# Altium PCB POE_PCB.PcbDoc
Units mm, origin at the board's own origin, x right, y up, seen from the top; angles counter-clockwise.
Board outline 72.05 x 44.05 mm, 2 copper layers (Top Layer, Bottom Layer); 67 components, 44 nets, 189 pads, 534 vias.
Unrouted connection lines stored in the file: 1.
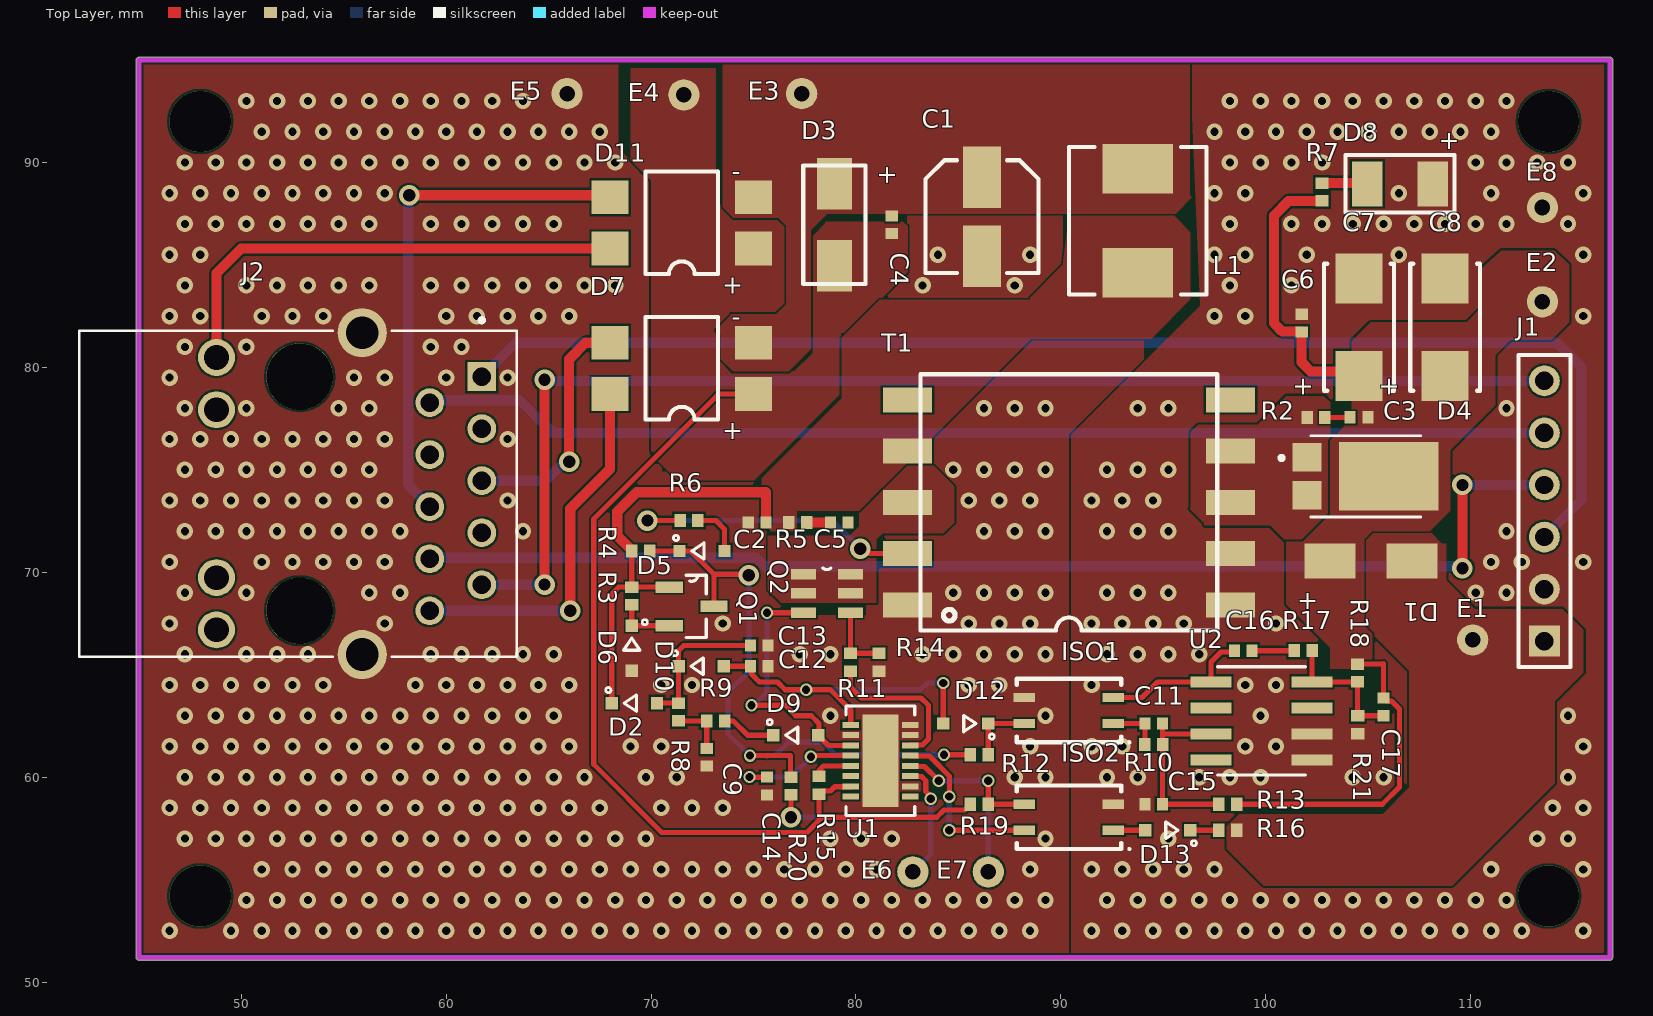
[diagram p0: Top Layer view]
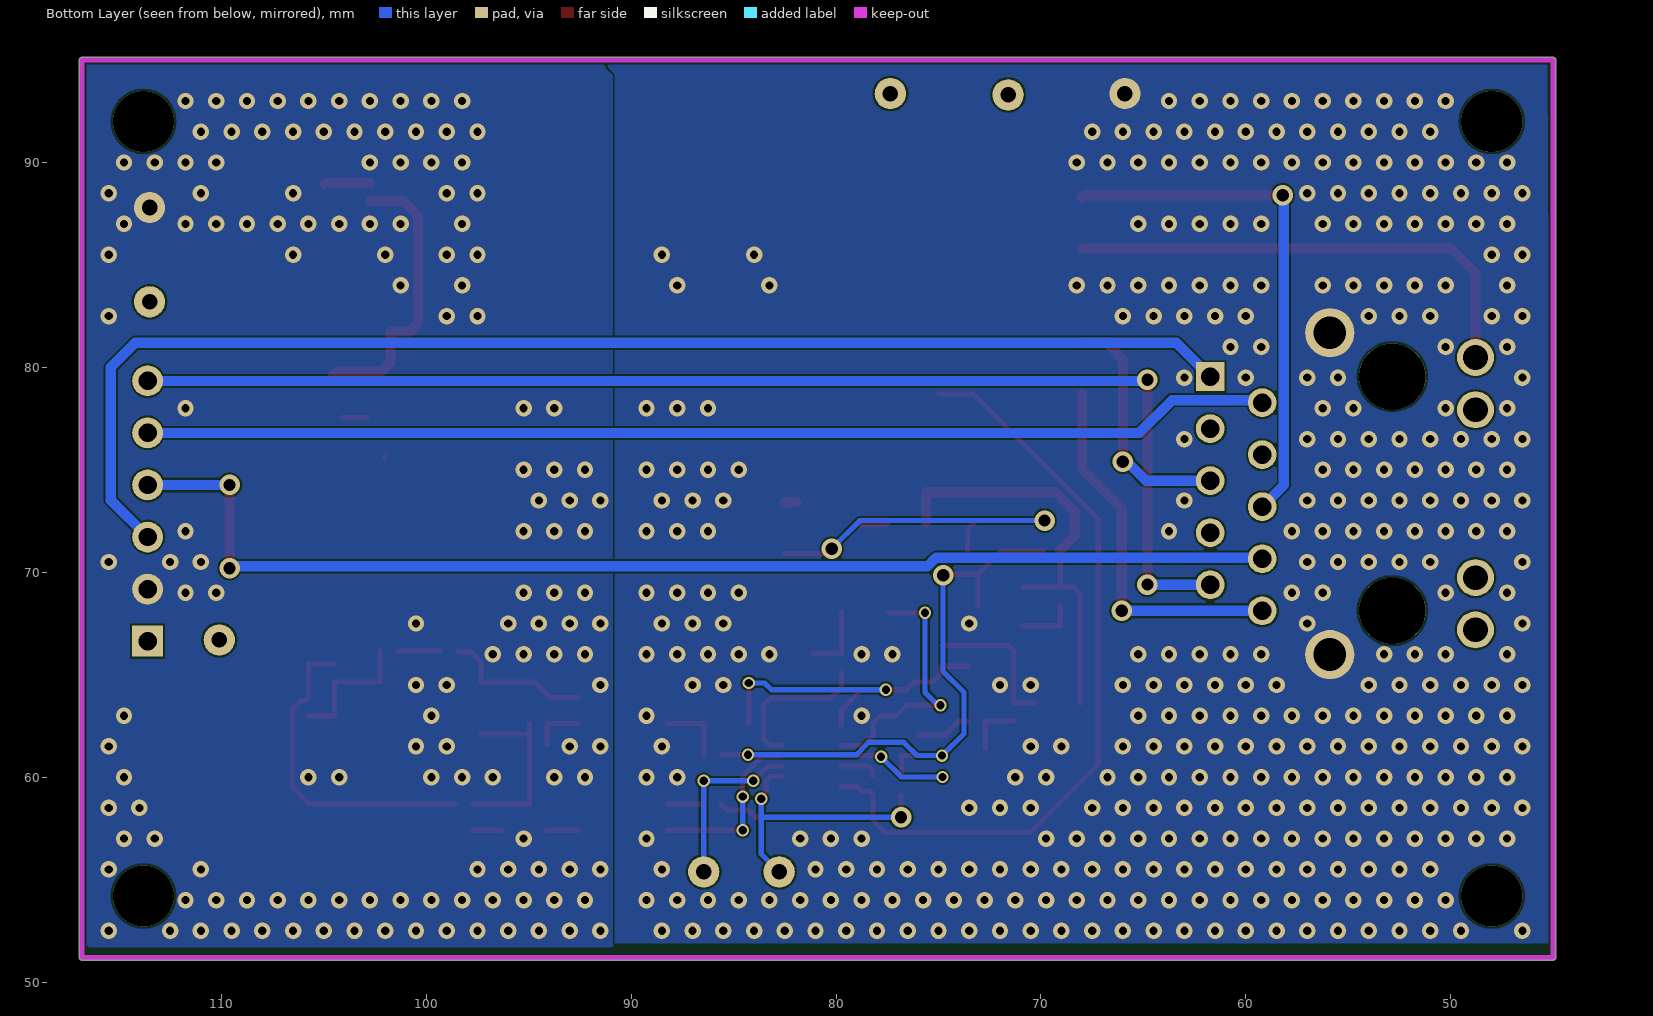
[diagram p1: Bottom Layer view, seen from below]
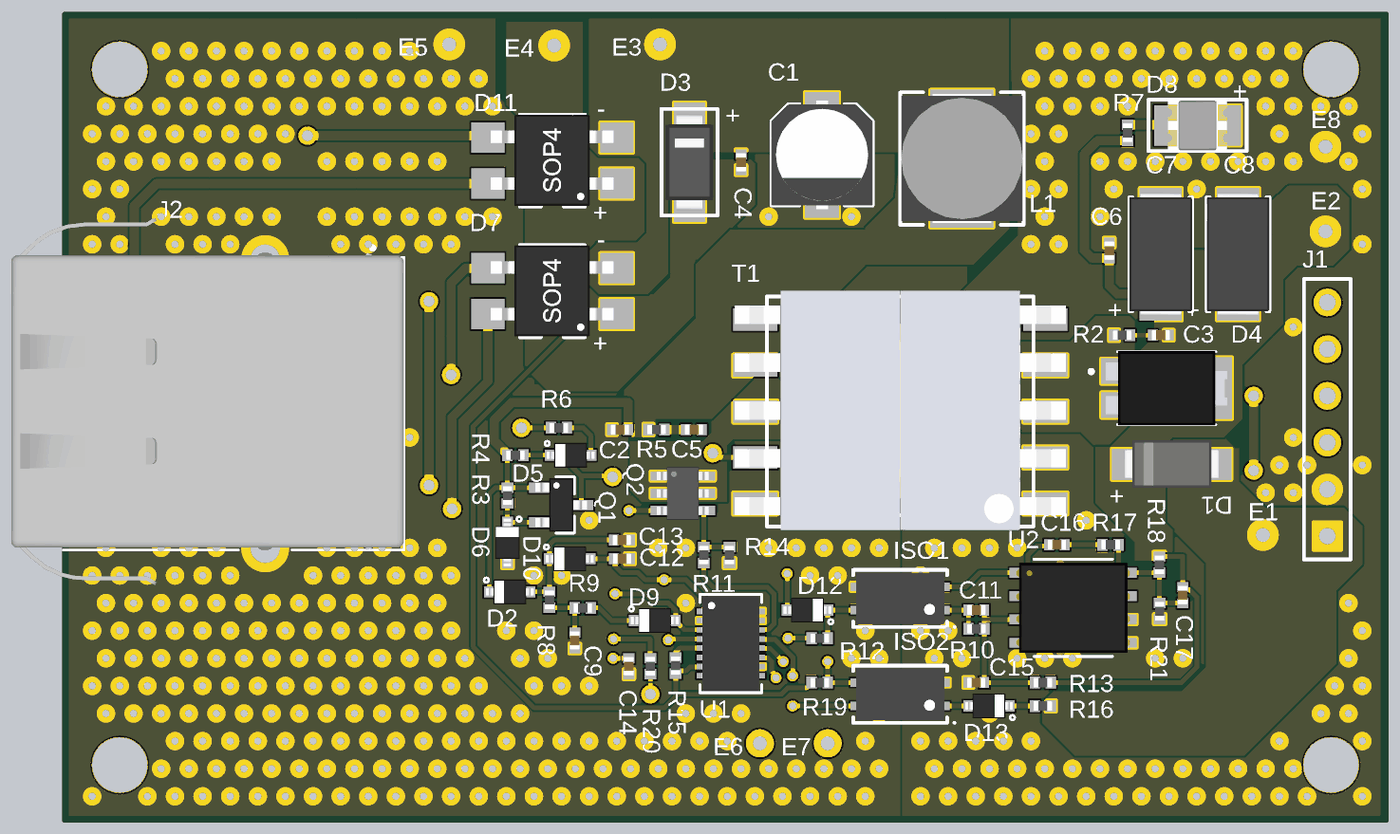
[diagram p2: 3D render of the assembled board from above, using the file's embedded part models]

## Layer stack, top to bottom
Top Solder: solder mask 0.0102, Solder Resist, Dk 3.5
Top Layer: signal copper 0.0356
Dielectric 1: dielectric 0.32, FR-4, Dk 4.8
Bottom Layer: signal copper 0.0356
Bottom Solder: solder mask 0.0102, Solder Resist, Dk 3.5

## Board outline
45,51.073 cw(c45,51.2) 44.873,51.2 44.873,95 cw(c45,95) 45,95.127 116.8,95.127 cw(c116.8,95) 116.927,95 116.927,51.2 cw(c116.8,51.2) 116.8,51.073

## Design rules (kind name [scope] priority, off if disabled: settings)
Clearance [All] p1: gap=0.1 ignorepadtopadclearanceinfootprint=TRUE
PlaneConnect [All] p1: planeconnectstyle=Direct reliefexpansion=0.508 reliefentries=4 reliefconductorwidth=0.254 reliefairgap=0.254
PolygonConnect [All] p1: connectstyle=Direct reliefconductorwidth=0.254 reliefentries=4 polygonreliefangle="90 Angle" airgapwidth=0.254
RoutingVias [All] p1: holewidth=0.6 width=1 viastyle="Through Hole" minholewidth=0.4 minwidth=0.6 maxholewidth=5 maxwidth=5
SolderMaskExpansion [All] p1: expansion=0.102
Width [All] p1: maxlimit=3 minlimit=0.254 preferedwidth=0.5 minimp=50.000000 maximp=50.000000 favimp=50.000000
29 further rules are at their usual default settings.

## Components (designator, comment, footprint, x,y, rotation, side; value= is the part's Value field where it differs from the comment)
C1 "EMVA630ADA4R7ME55G" CAPAE5953X52M 86.15,87.359 r270 top value=4.7uF
C2 "JMK105C6105KV-F" *CAPC1005X55N 75.176,72.427 r180 top value=1uF
C3 "CC0402KRX7R9BB681" *CAPC1005X55N 104.55,77.559 r0 top value=680pF
C4 "GRM155R71H104KE14J" *CAPC1005X55N 81.75,86.959 r270 top value=0.1uF
C5 "OPT" *CAPC1005X55N 79.189,72.427 r0 top
C6 "GRM155R60G106ME44D" *CAPC1005X55N 101.75,82.159 r270 top value=10uF
C7 "TPSC476K016R0350" CAPM6032X22N 104.55,81.959 r90 top value=47uF
C8 "TPSC476K016R0350" CAPM6032X22N 108.75,81.959 r90 top value=47uF
C9 "GRM155R61E103KA01D" *CAPC1005X55N 72.719,60.966 r90 top value=0.01uF
C11 "GRM155R61E103KA01D" *CAPC1005X55N 94.532,62.617 r0 top value=0.01uF
C12 "OPT" *CAPC1005X55N 75.282,65.411 r0 top
C13 "GRM155R61H474KE11D" *CAPC1005X55N 75.282,66.427 r180 top value=0.47uF
C14 "GRM155R60J475ME47D" *CAPC1005X55N 75.657,59.566 r90 top value=4.7uF
C15 "GRM155R61E103KA01D" *CAPC1005X55N 94.532,58.68 r180 top value=0.01uF
C16 "CC0402ZRY5V7BB333" *CAPC1005X55N 98.904,66.173 r0 top value=0.033uF
C17 "OPT" *CAPC1005X55N 105.745,63.43 r90 top
D1 "B220A-13-F" *SMA-DIODE 105.15,70.559 r180 top
D2 "1N4148WS-7-F" *SOD323_1N4148WS-7-F(Primary) 69.186,63.614 r0 top
D3 "SMAJ58A-13-F" SMAJ 78.95,86.959 r270 top
D4 "PDS360-13" *DIO_PDS360-13 104.873,74.682 r270 top
D5 "BAS516-TP" *SOD323_1N4148WS-7-F(Primary) 72.488,71.039 r0 top value=BAS516
D6 "MM3Z8V2ST1G" *SOD323_1N4148WS-7-F(Primary) 69.059,66.292 r270 top value=8.2V
D7 "HD01-T" HD01-T 75,78.7 r180 top
D8 "APD3224ZGC-F01" LED1210 106.55,88.959 r0 top value="LED GRN"
D9 "1N4148WS-7-F" *SOD323_1N4148WS-7-F(Primary) 77.06,62.05 r0 top
D10 "1N4148WS-7-F" *SOD323_1N4148WS-7-F(Primary) 72.445,65.411 r0 top
D11 "HD01-T" HD01-T 75,85.8 r180 top
D12 "BAS516-TP" *SOD323_1N4148WS-7-F(Primary) 85.358,62.617 r180 top value=BAS516
D13 "MM3Z8V2ST1G" *SOD323_1N4148WS-7-F(Primary) 95.221,57.41 r180 top value=8.2V
E1 "12V AUX" E_PAD 110.1,66.7 r0 top
E2 "VOUT(12V @ 0.9A)" E_PAD 113.5,83.2 r0 top
E3 "PoE+" E_PAD 77.35,93.359 r0 top
E4 "PoE-" E_PAD 71.6,93.3 r0 top
E5 "PGND" E_PAD 65.9,93.359 r0 top
E6 "PWRGD" E_PAD 82.775,55.378 r0 top
E7 "SIGDISA" E_PAD 86.458,55.378 r0 top
E8 "ISO GND" E_PAD 113.5,87.8 r0 top
ISO1 "PS2913-1-K-A" SOic254P1016X440-4N 90.395,63.252 r180 top value=8.2uH
ISO2 "PS2913-1-K-A" SOic254P1016X440-4N 90.395,58.045 r180 top value=8.2uH
J1 "Header 6" HDR1X6 113.6,66.64 r90 top
J2 "1-2301994-2" *TE_1-2301994-2_1-2301994-2(Primary) 52.775,73.835 r270 top
L1 "IHLP2525CZER8R2M01" INDP6866X23N 93.75,87.159 r270 top value=8.2uH
Q1 "MMBTA42LT1G" SOT-23-3(TO-236) 71.98,68.332 r0 top
Q2 "FDC2612" *SOT95P280X100-6N 78.584,68.967 r0 top
R2 "RC0402FR-0713RL" RESC1005X40N 102.452,77.559 r180 top value=13R
R3 "CRGCQ0402F220K" RESC1005X40N 69.059,68.84 r270 top value=220K
R4 "CRGCQ0402F220K" RESC1005X40N 69.494,71.039 r0 top value=220K
R5 "OPT" RESC1005X40N 77.154,72.427 r180 top
R6 "RC0402FR-07150RL" RESC1005X40N 71.853,72.523 r180 top value=150R
R7 "RC0402FR-072KL" RESC1005X40N 102.75,88.559 r90 top value=2K
R8 "RN73R1ETTP3003B25" RESC1005X40N 71.345,63.179 r270 top value=300K
R9 "RC0402FR-07100RL" RESC1005X40N 73.153,62.732 r0 top value=100R
R10 "ERA-2AEB752X" RESC1005X40N 94.535,61.601 r0 top value=7.5K
R11 "RC0402FR-0710KL" RESC1005X40N 79.727,65.611 r90 top value=10K
R12 "ERA-2AED682X" RESC1005X40N 86.023,61.093 r0 top value=6.8K
R13 "RC0402FR-071KL" RESC1005X40N 98.142,58.68 r0 top value=1K
R14 "ERJ-2BWFR050X" RESC1005X40N 81.124,65.611 r270 top value=0.05R
R15 "RP73PF1E45R3BTD" RESC1005X40N 78.197,59.604 r90 top value=45R3
R16 "ERA-2AEB4021X" RESC1005X40N 98.142,57.41 r0 top value=4.02K
R17 "RMCF0402FT61K9" RESC1005X40N 101.825,66.173 r180 top value=61.9K
R18 "RP73PF1E107KBTD" RESC1005X40N 104.475,65.084 r90 top value=107K
R19 "ERA-2AEB104X" RESC1005X40N 86.023,58.68 r0 top value=100K
R20 "CPF0402B200KE" RESC1005X40N 76.826,59.569 r270 top value=200K
R21 "ERA-2AEB2802X" RESC1005X40N 104.492,62.563 r90 top value=28K
T1 "PA1138NLT" EP13T 98.269,68.412 r180 top value=PA1138NL
U1 "LTC4267CDHC" DFN-16_DHC 81.196,60.8 r0 top
U2 "LT1431CS8PBF" *SO-8_S 99.793,62.744 r0 top

## Footprints (in the part's own frame and the unit in brackets; to place one, negate y for a bottom-side part, rotate by r counter-clockwise, add the part's x,y. Pads: shape width x height; smd on the part's side, far side on the other; paste and mask are expansions set on the pad)
*CAPC1005X55N [mm]
  rect 0.54x0.6 smd: 1(-0.432,0) 2(0.432,0)
  body extent -0.5,-0.27 0.5,0.28, height 0.48
*DIO_PDS360-13 [mm]
  rect 1.39x1.4 smd: 1(-0.92,-2.856) 2(0.92,-2.856)
  rect 3.36x4.86 smd: 3(0,1.126)
  silkscreen extent -1.98,-4.2 1.98,2.69, body extent -2.02,-3.3 2.03,3.3, height 1.17
*SMA-DIODE [mm]
  rect 2.5x1.7 smd: 1(-1.992,0.015) 2(2.008,0.015)
  body extent -2.6,-1.3 2.6,1.3, height 2.4
*SO-8_S [mil]
  rect 78x21 smd: 1(-97,75) 2(-97,25) 3(-97,-25) 4(-97,-75) 5(97,-75) 6(97,-25) 7(97,25) 8(97,75)
  silkscreen extent -84,-104 84,104, body extent -121,-101 121,101, height 41
*SOD323_1N4148WS-7-F(Primary) [mm]
  rect 0.6x0.6 smd: A(1.1,0) C(-1.1,0)
  silkscreen extent -1.4,-0.4 0.1,0.76, body extent -1.3,-0.67 1.3,0.68, height 1.1
*SOT95P280X100-6N [mil]
  rect 48x20 smd: 1(-45,37) 2(-45,0) 3(-45,-37) 4(45,-37) 5(45,0) 6(45,37)
  silkscreen extent -8,46 8,49, body extent -56,-57 56,57, height 39
*TE_1-2301994-2_1-2301994-2(Primary) [mm]
  round 3.25 hole 3.25 unplated: None(-5.715,0.075) None(5.715,0.075)
  rect 1.408x1.408 hole 0.9: P1(-5.715,8.965)
  round 1.408 hole 0.9: P2(-4.445,6.425) P3(-3.175,8.965) P4(-1.905,6.425) P5(-0.635,8.965) P6(0.635,6.425) P7(1.905,8.965) P8(3.175,6.425) P9(4.445,8.965) P10(5.715,6.425)
  round 1.8 hole 1.2: P11(-6.645,-3.985) P12(-4.095,-3.985) P13(4.095,-3.985) P14(6.645,-3.985)
  round 2.4 hole 1.6: SH1(-7.855,3.125) SH2(7.855,3.125)
  silkscreen extent -8.56,-10.68 7.95,10.68, body extent -10.13,-10.68 9.87,10.67, height 15.79
CAPAE5953X52M [mm] "Aluminum Electrolytic Capacitor, Body 5.30x5.30x5.20mm, IPC Low Density"
  rect 3x1.85 smd: 1(-1.925,0) 2(1.925,0)
  silkscreen extent -2.75,-2.75 2.75,2.75, body extent -2.95,-2.75 2.95,2.75, height 5.2
CAPM6032X22N [mm] "Molded Capacitor, 2-Leads, Body 6.00x3.20mm, IPC Medium Density"
  rect 2.45x2.3 smd: 1(-2.375,0) 2(2.375,0)
  silkscreen extent -3.1,-1.7 3.1,1.7, body extent -3.32,-1.7 3.32,1.7, height 2.2
DFN-16_DHC [mm]
  rect 0.805x0.3 smd: 1(-1.452,1.75) 2(-1.452,1.25) 3(-1.452,0.75) 4(-1.452,0.25) 5(-1.452,-0.25) 6(-1.452,-0.75) 7(-1.452,-1.25) 8(-1.452,-1.75) 9(1.452,-1.75) 10(1.452,-1.25) 11(1.452,-0.75) 12(1.452,-0.25) 13(1.452,0.25) 14(1.452,0.75) 15(1.452,1.25) 16(1.452,1.75)
  rect 1.75x4.5 smd paste-3: 17(0,0)
  silkscreen extent -1.68,-2.67 1.68,2.67, body extent -1.56,-2.54 1.56,2.56, height 0.8
E_PAD [mil]
  round 60 hole 30: 1(0,0)
EP13T [mm]
  rect 2.4x1.22 smd: 1(15.748,0) 2(15.748,-2.5) 3(15.748,-5) 4(15.748,-7.5) 5(15.748,-10) 6(-0.012,-10) 7(-0.012,-7.5) 8(-0.012,-5) 9(-0.012,-2.5) 10(-0.012,0)
  silkscreen extent 0.63,-11.25 15.11,1.25, body extent -1.13,-11.56 16.88,1.44, height 11.51
HD01-T [mm] "Bridge Rectifier Single Phase Standard 100V Surface Mount 4-MiniDIP"
  rect 1.8x1.65 smd: 1(0,0) 2(0,-2.5) 3(7,-2.5) 4(7,0)
  silkscreen extent 1.73,-3.75 5.27,1.25, body extent 0.17,-3.74 6.86,1.2, height 2.9
HDR1X6 [mm] "Connector; Header; 6 Position"
  rect 1.5x1.5 hole 0.9: 1(0,0)
  round 1.5 hole 0.9: 2(2.54,0) 3(5.08,0) 4(7.62,0) 5(10.16,0) 6(12.7,0)
  silkscreen extent -1.27,-1.27 13.97,1.27
INDP6866X23N [mil] "Precision Wire Wound Inductor, 2-Leads, Body 6.81x6.59mm, IPC Medium Density"
  rect 95.2x135 smd: 1(-100,0) 2(100,0)
  silkscreen extent -142,-132 142,132, body extent -138,-130 138,130, height 94
LED1210 [mm]
  rect 1.5x2.2 smd: A(-1.6,0) K(1.6,0)
  silkscreen extent -2.67,-1.4 2.67,1.4, body extent -1.62,-1.35 1.62,1.35, height 1.1
RESC1005X40N [mm]
  rect 0.56x0.64 smd: 1(-0.435,0) 2(0.435,0)
  body extent -0.5,-0.25 0.5,0.25, height 0.4
SMAJ [mm]
  rect 2.5x1.7 smd: A(-2,0) K(2,0)
  silkscreen extent -2.9,-1.52 2.9,1.52, body extent -2.6,-1.3 2.6,1.3, height 2.69
SOic254P1016X440-4N [mm] "SON, 4-Leads, Body 2.50x4.60mm, Pitch 1.27mm, IPC Medium Density"
  rect 1.05x0.45 smd: 1(-2.17,0.635) 2(-2.17,-0.635) 3(2.17,-0.635) 4(2.17,0.635)
  silkscreen extent -3,-1.55 2.55,1.6, body extent -2.4,-1.4 2.4,1.4, height 2.1
SOT-23-3(TO-236) [mil]
  rect 52x22 smd: 1(-43,37) 2(-43,-37) 3(43,0)
  silkscreen extent -11,-60 28,60, body extent -55,-57 55,57, height 51

## Part data
C1: "4.7µF 63V Aluminum Electrolytic Capacitors Radial, Can - SMD 2000 Hrs @ 85°C", Availability=Unavailable, MF="United Chemi-Con", MP=EMVA630ADA4R7ME55G, SnapEDA_Link=https://www.snapeda.com/parts/EMVA630ADA4R7ME55G/United%20Chemi-Con/view-part/?ref=search&t=EMVA630ADA4R7ME55G
C2: "1µF ±10% 6.3V Ceramic Capacitor X6S 0402 (1005 Metric)", Availability=Unavailable, Digi-Key_Part_Number=587-3381-2-ND, Digi-Key_Purchase_URL=https://www.digikey.com.au/product-detail/en/taiyo-yuden/JMK105C6105KV-F/587-3381-2-ND/4157224, MF="Taiyo Yuden", MP=JMK105C6105KV-F, SnapEDA_Link=https://www.snapeda.com/parts/JMK105C6105KV-F/Taiyo%20Yuden/view-part/?ref=search&t=JMK105C6105KV-F
C3: "680pF ±10% 50V Ceramic Capacitor X7R 0402 (1005 Metric)", Digi-Key Part Number=311-1030-2-ND, Availability=Unavailable, MF=Yageo, MP=CC0402KRX7R9BB681, SnapEDA_Link=https://www.snapeda.com/parts/CC0402KRX7R9BB681/Yageo/view-part/?ref=search&t=CC0402KRX7R9BB681
C4: "SMD Capacitor X7R(EIA) with Capacitance: 0.10uF Tol. 10%. Rated Voltage: 50Vdc", Availability=Unavailable, MF="Murata Electronics", MP=GRM155R71H104KE14J, SnapEDA_Link=https://www.snapeda.com/parts/GRM155R71H104KE14J/Murata%20Electronics%20North%20America/view-part/1836262/?ref=snap
C5 C12 C17: library part OPT_C, Availability=Unavailable
C6: "10µF ±20% 4V Ceramic Capacitor X5R 0402 (1005 Metric)", Digi-Key Part Number=490-10693-2-ND, Availability=Unavailable, MF="Murata Electronics", MP=GRM155R60G106ME44D, SnapEDA_Link=https://www.snapeda.com/parts/GRM155R60G106ME44D/Murata/view-part/?ref=search&t=GRM155R60G106ME44D
C7 C8: "47µF Molded Tantalum Capacitors 16V 2312 (6032 Metric) 350mOhm", Digi-Key Part Number=478-1773-2-ND, Availability=Unavailable, MF="AVX Corporation", MP=TPSC476K016R0350, SnapEDA_Link=https://www.snapeda.com/parts/TPSC476K016R0350/AVX/view-part/?ref=search&t=TPSC476K016R0350#download-modal
C9 C11 C15: "0.01uF ±10% 25V Ceramic Capacitor X5R 0402 (1005 Metric)", Availability=Unavailable, MF="Murata Electronics", MP=GRM155R61E103KA01D, SnapEDA_Link=https://www.snapeda.com/parts/GRM155R61E103KA01D/Murata%20Electronics/view-part/?ref=search&t=GRM155R61E103KA01D
C13: "0.47µF ±10% 50V Ceramic Capacitor X5R 0402 (1005 Metric)", Availability=Unavailable, MF="Murata Electronics", MP=GRM155R61H474KE11D, SnapEDA_Link=https://www.snapeda.com/parts/GRM155R61H474KE11D/Murata%20Electronics/view-part/?ref=search&t=GRM155R61H474KE11D
C14: "4.7µF ±20% 6.3V Ceramic Capacitor X5R 0402 (1005 Metric)", Availability=Unavailable, MF="Murata Electronics", MP=GRM155R60J475ME47D, SnapEDA_Link=https://www.snapeda.com/parts/GRM155R60J475ME47D/Murata/view-part/?ref=search&t=GRM155R60J475ME47D
C16: "0.033µF -20%, +80% 16V Ceramic Capacitor Y5V (F) 0402 (1005 Metric)", Digi-Key Part Number=311-1044-2-ND, Availability=Unavailable, MF=Yageo, MP=CC0402ZRY5V7BB333, SnapEDA_Link=https://www.snapeda.com/parts/CC0402ZRY5V7BB333/Yageo/view-part/?ref=search&t=CC0402ZRY5V7BB333
D1: "Diode Schottky 20V 2A Surface Mount SMA", Digi-Key Part Number=B220A-FDITR-ND, MF="Diodes Incorporated", MP=B220A-13-F, SnapEDA_Link=https://www.snapeda.com/parts/B220A-13-F/Diodes%20Inc./view-part/232956/?ref=snap
D2 D9 D10: "Diode Standard 75V 150mA Surface Mount SOD-323", Digi-Key Part Number=1N4148WS-FDITR-ND, Digi-Key_Purchase_URL=https://www.digikey.com.au/product-detail/en/diodes-incorporated/1N4148WS-7-F/1N4148WS-FDITR-ND/815127, MF="Diodes Incorporated", MP=1N4148WS-7-F, SnapEDA_Link=https://www.snapeda.com/parts/1N4148WS-7-F/Multicomp/view-part/957937/?ref=snap
D3: "93.6V Clamp 4.3A Ipp Tvs Diode Surface Mount SMA", Package="DO-214 Littelfuse", Availability=Unavailable, MF="Littelfuse Inc.", MP=SMAJ58A-13-F, Price=None, SnapEDA_Link=https://www.snapeda.com/parts/SMAJ58A/Littelfuse%20Inc./view-part/53813/?ref=snap
D5 D12: "Diode Standard 75V 250mA (DC) Surface Mount SOD-523", Digi-Key Part Number=BAS516-TPMSTR-ND, Digi-Key_Purchase_URL=https://www.digikey.com.au/product-detail/en/micro-commercial-co/BAS516-TP/BAS516-TPMSTR-ND/7681805, MF="Micro Commercial Co", MP=BAS516-TP, SnapEDA_Link=https://www.snapeda.com/parts/BAS516/Nexperia%20USA/view-part/?ref=search&t=BAS516-TP
D6 D13: "Zener Diode 8.2V 300mW ±2% Surface Mount SOD-323", Digi-Key_Part_Number=MM3Z8V2ST1GOSTR-ND, Digi-Key_Purchase_URL=https://www.digikey.com.au/product-detail/en/on-semiconductor/MM3Z8V2ST1G/MM3Z8V2ST1GOSTR-ND/661874, MF="ON Semiconductor", MP=MM3Z8V2ST1G, SnapEDA_Link=https://www.snapeda.com/parts/MM3Z8V2ST1G/ON%20Semiconductor/view-part/?ref=search&t=MM3Z8V2ST1G
D7 D11: "Bridge Rectifier Single Phase Standard 100V Surface Mount 4-MiniDIP", Package=None, Availability=Unavailable, MF="Diodes Incorporated", MP=HD01-T, Price=None, SnapEDA_Link=https://www.snapeda.com/parts/HD01-T/Diodes%20Inc./view-part/?ref=search&t=HD01-T
D8: "Green 525nm LED Indication - Discrete 3.3V 1210 (3225 Metric)", Package=None, Digi-Key_Part_Number=754-1089-2-ND, Digi-Key_Purchase_URL=https://www.digikey.com.au/product-detail/en/kingbright/APD3224ZGC-F01/754-1089-2-ND/1747487, MF=Kingbright, MP=APD3224ZGC-F01, SnapEDA_Link=https://www.snapeda.com/parts/APD3224ZGC-F01/Kingbright/view-part/?ref=search&t=APD3224ZGC-F01
E1 E2 E3 E4 E5 E6 E7 E8: library part E_PAD
ISO1 ISO2: "Optoisolator Transistor Output 2500Vrms 1 Channel 4-Mini-Flat", Digi-Key_Part_Number=PS2913-1-K-A-ND, Digi-Key_Purchase_URL=https://www.digikey.com.au/product-detail/en/cel/PS2913-1-K-A/PS2913-1-K-A-ND/2614692, MF=CEL, MP=PS2913-1-K-A, SnapEDA_Link=https://www.snapeda.com/parts/PS2913-1-K-A/CEL/view-part/?ref=search&t=ps2913-1-k-a#download-modal
J1: "Header, 6-Pin", LatestRevisionDate=17-Jul-2002, LatestRevisionNote="Re-released for DXP Platform.", Publisher="Altium Limited"
L1: "8.2µH Shielded Molded Inductor 4A 68mOhm Max Nonstandard", Package=None, Availability=Unavailable, MF="Vishay Dale", MP=IHLP2525CZER8R2M01, Price=None, SnapEDA_Link=https://www.snapeda.com/parts/IHLP2525CZER8R2M01/Vishay%20Dale/view-part/?ref=search&t=IHLP2525CZER8R2M01
Q1: "Bipolar (BJT) Transistor NPN 300V 500mA 50MHz 225mW Surface Mount SOT-23-3 (TO-236)", Digi-Key_Part_Number=MMBTA42LT1GOSTR-ND, Digi-Key_Purchase_URL=https://www.digikey.com.au/product-detail/en/on-semiconductor/MMBTA42LT1G/MMBTA42LT1GOSTR-ND/919627, MF="ON Semiconductor", MP=MMBTA42LT1G, SnapEDA_Link=https://www.snapeda.com/parts/MMBTA42LT1G/ON%20Semiconductor/view-part/?ref=search&t=MMBTA42LT1G
Q2: "N-Channel 200V 1.1A (Ta) 1.6W (Ta) Surface Mount SuperSOT™-6", Digi-Key Part Number=FDC2612TR-ND, ComponentLink1Description="Manufacturer Link", ComponentLink1URL=http://www.irf.com/, Digi-Key_Purchase_URL=https://www.digikey.com.au/product-detail/en/on-semiconductor/FDC2612/FDC2612TR-ND/979778, MF="ON Semiconductor", MP=FDC2612, SnapEDA_Link=https://www.snapeda.com/parts/FDC2612/ON%20Semiconductor/view-part/?ref=search&t=FDC2612
R2: "13 Ohms ±1% 0.063W, 1/16W Chip Resistor 0402 (1005 Metric) Moisture Resistant Thick Film", Package=none, Digi-Key_Part_Number=YAG2977TR-ND, Digi-Key_Purchase_URL=https://www.digikey.com.au/product-detail/en/yageo/RC0402FR-0713RL/YAG2977TR-ND/5280837, MF=Yageo, MP=RC0402FR-0713RL, SnapEDA_Link=https://www.snapeda.com/parts/RC0402FR-0713RL/Yageo/view-part/?ref=search&t=RC0402FR-0713RL
R3 R4: "220 kOhms ±1% 0.063W, 1/16W Chip Resistor 0402 (1005 Metric) Automotive AEC-Q200, Moisture Resistant Thick Film", Package=None, Digi-Key_Part_Number=A129655TR-ND, Digi-Key_Purchase_URL=https://www.digikey.com.au/product-detail/en/te-connectivity-passive-product/CRGCQ0402F220K/A129655TR-ND/8576257, MF="TE Connectivity Passive Product", MP=CRGCQ0402F220K, SnapEDA_Link=https://www.snapeda.com/parts/CRGCQ0402F220K/TE%20Connectivity/view-part/?ref=search&t=CRGCQ0402F220K
R5: library part OPT_R, Package=none
R6: "150 Ohms ±1% 0.063W, 1/16W Chip Resistor 0402 (1005 Metric) Moisture Resistant Thick Film", Package=none, Digi-Key_Part_Number=311-150LRTR-ND, Digi-Key_Purchase_URL=https://www.digikey.com.au/product-detail/en/yageo/RC0402FR-07150RL/311-150LRTR-ND/726543, MF=Yageo, MP=RC0402FR-07150RL, SnapEDA_Link=https://www.snapeda.com/parts/RC0402FR-07150RL/Yageo/view-part/?ref=search&t=RC0402FR-07150RL
R7: "2 kOhms ±1% 0.063W, 1/16W Chip Resistor 0402 (1005 Metric) Moisture Resistant Thick Film", Package=None, Digi-Key_Part_Number=311-2KLRTR-ND, Digi-Key_Purchase_URL=https://www.digikey.com.au/product-detail/en/yageo/RC0402FR-072KL/311-2KLRTR-ND/2827565, MF=Yageo, MP=RC0402FR-072KL, SnapEDA_Link=https://www.snapeda.com/parts/RC0402FR-072KL/Yageo/view-part/?ref=search&t=RC0402FR-072KL
R8: "300 kOhms ±0.1% 0.063W, 1/16W Chip Resistor 0402 (1005 Metric) Moisture Resistant Metal Film", Package=None, Digi-Key_Part_Number=2019-RN73R1ETTP3003B25TR-ND, Digi-Key_Purchase_URL=https://www.digikey.com.au/product-detail/en/koa-speer-electronics-inc/RN73R1ETTP3003B25/2019-RN73R1ETTP3003B25TR-ND/10003541, MF="KOA Speer Electronics, Inc.", MP=RN73R1ETTP3003B25, SnapEDA_Link=https://www.snapeda.com/parts/RN73R1ETTP3003B25/KOA%20Speer%20Electronics,%20Inc./view-part/?ref=search&t=RN73R1ETTP3003B25
R9: "100 Ohms ±1% 0.063W, 1/16W Chip Resistor 0402 (1005 Metric) Moisture Resistant Thick Film", Package=None, Digi-Key_Part_Number=311-100LRTR-ND, Digi-Key_Purchase_URL=https://www.digikey.com.au/product-detail/en/yageo/RC0402FR-07100RL/311-100LRTR-ND/726527, MF=Yageo, MP=RC0402FR-07100RL, SnapEDA_Link=https://www.snapeda.com/parts/RC0402FR-07100RL/Yageo/view-part/?ref=search&t=RC0402FR-07100RL
R10: "7.5 kOhms ±0.1% 0.063W, 1/16W Chip Resistor 0402 (1005 Metric) Automotive AEC-Q200 Thin Film", Package=None, Digi-Key_Part_Number=P7.5KDCTR-ND, Digi-Key_Purchase_URL=https://www.digikey.com.au/product-detail/en/panasonic-electronic-components/ERA-2AEB752X/P7-5KDCTR-ND/1706026, MF="Panasonic Electronic Components", MP=ERA-2AEB752X, SnapEDA_Link=https://www.snapeda.com/parts/ERA-2AEB752X/Panasonic/view-part/?ref=search&t=ERA-2AEB752X
R11: "10 kOhms ±1% 0.063W, 1/16W Chip Resistor 0402 (1005 Metric) Moisture Resistant Thick Film", Package=None, Digi-Key_Part_Number=311-10.0KLRTR-ND, Digi-Key_Purchase_URL=https://www.digikey.com.au/product-detail/en/yageo/RC0402FR-0710KL/311-10-0KLRTR-ND/726523, MF=Yageo, MP=RC0402FR-0710KL, SnapEDA_Link=https://www.snapeda.com/parts/RC0402FR-0710KL/Yageo/view-part/?ref=search&t=RC0402FR-0710KL
R12: "6.8 kOhms ±0.5% 0.063W, 1/16W Chip Resistor 0402 (1005 Metric) Automotive AEC-Q200 Thin Film", Package=none, Digi-Key_Part_Number=P6.8KDETR-ND, Digi-Key_Purchase_URL=https://www.digikey.com.au/product-detail/en/panasonic-electronic-components/ERA-2AED682X/P6-8KDETR-ND/1706122, MF="Panasonic Electronic Components", MP=ERA-2AED682X, SnapEDA_Link=https://www.snapeda.com/parts/ERA-2AED682X/Panasonic/view-part/?ref=search&t=ERA-2AED682X
R13: "1 kOhms ±1% 0.063W, 1/16W Chip Resistor 0402 (1005 Metric) Moisture Resistant Thick Film", Package=None, Digi-Key_Part_Number=311-1.00KLRTR-ND, Digi-Key_Purchase_URL=https://www.digikey.com.au/product-detail/en/yageo/RC0402FR-071KL/311-1-00KLRTR-ND/726513, MF=Yageo, MP=RC0402FR-071KL, SnapEDA_Link=https://www.snapeda.com/parts/RC0402FR-071KL/Yageo/view-part/?ref=search&t=RC0402FR-071KL
R14: "50 mOhms ±1% 0.25W, 1/4W Chip Resistor 0402 (1005 Metric) Automotive AEC-Q200, Current Sense Thick Film", Package=None, Digi-Key_Part_Number=P17367TR-ND, Digi-Key_Purchase_URL=https://www.digikey.com.au/product-detail/en/panasonic-electronic-components/ERJ-2BWFR050X/P17367TR-ND/5647400, MF="Panasonic Electronic Components", MP=ERJ-2BWFR050X, SnapEDA_Link=https://www.snapeda.com/parts/ERJ-2BWFR050X/Panasonic%20Electronic/view-part/?ref=search&t=ERJ-2BWFR050X
R15: "Fixed Resistor RP 1E 0.1W 45R3 0.1% 25PPM 5K RL", Package=None, Digi-Key_Part_Number=A127190TR-ND, Digi-Key_Purchase_URL=https://www.digikey.com.au/product-detail/en/te-connectivity-passive-product/RP73PF1E45R3BTD/A127190TR-ND/8260732, MF="TE Connectivity Passive Product", MP=RP73PF1E45R3BTD, SnapEDA_Link=https://www.snapeda.com/parts/RP73PF1E45R3BTD/TE%20Connectivity/view-part/?ref=search&t=RP73PF1E45R3BTD
R16: "4.02 kOhms ±0.1% 0.063W, 1/16W Chip Resistor 0402 (1005 Metric) Automotive AEC-Q200 Thin Film", Package=None, Digi-Key_Part_Number=P4.02KDCTR-ND, Digi-Key_Purchase_URL=https://www.digikey.com.au/product-detail/en/panasonic-electronic-components/ERA-2AEB4021X/P4-02KDCTR-ND/2026107, MF="Panasonic Electronic Components", MP=ERA-2AEB4021X, SnapEDA_Link=https://www.snapeda.com/parts/ERA-2AEB4021X/Panasonic%20Electronic/view-part/?ref=search&t=ERA-2AEB4021X
R17: "61.9 kOhms ±1% 0.063W, 1/16W Chip Resistor 0402 (1005 Metric) Automotive AEC-Q200 Thick Film", Package=None, Digi-Key_Part_Number=RMCF0402FT61K9TR-ND, Digi-Key_Purchase_URL=https://www.digikey.com.au/product-detail/en/stackpole-electronics-inc/RMCF0402FT61K9/RMCF0402FT61K9TR-ND/1761731, MF="Stackpole Electronics Inc", MP=RMCF0402FT61K9, SnapEDA_Link=https://www.snapeda.com/parts/RMCF0402FT61K9/Stackpole%20Electronics%20Inc/view-part/?ref=search&t=RMCF0402FT61K9
R18: "107 kOhms ±0.1% 0.1W, 1/10W Chip Resistor 0402 (1005 Metric) Thin Film", Package=None, Digi-Key_Part_Number=A127514TR-ND, Digi-Key_Purchase_URL=https://www.digikey.com.au/product-detail/en/te-connectivity-passive-product/RP73PF1E107KBTD/A127514TR-ND/8261056, MF="TE Connectivity Passive Product", MP=RP73PF1E107KBTD, SnapEDA_Link=https://www.snapeda.com/parts/RP73PF1E107KBTD/TE%20Connectivity/view-part/?ref=search&t=RP73PF1E107KBTD
R19: "100 kOhms ±0.1% 0.063W, 1/16W Chip Resistor 0402 _1005 Metric_ Automotive AEC-Q200 Thin Film", Package="1005 Panasonic Electronic Components", Digi-Key_Part_Number=P100KDCCT-ND, Digi-Key_Purchase_URL=https://www.digikey.com/product-detail/en/panasonic-electronic-components/ERA-2AEB104X/P100KDCCT-ND/1706231?utm_source=snapeda&utm_medium=aggregator&utm_campaign=symbol, MF="Panasonic Electronic", MP=ERA-2AEB104X, SnapEDA_Link=https://www.snapeda.com/parts/ERA-2AEB104X/Panasonic%20Electronic%20Components/view-part/419877/?ref=snap
R20: "200 kOhms ±0.1% 0.063W, 1/16W Chip Resistor 0402 (1005 Metric) Thin Film", Package=none, Digi-Key_Part_Number=A119933TR-ND, Digi-Key_Purchase_URL=https://www.digikey.com.au/product-detail/en/te-connectivity-passive-product/CPF0402B200KE/A119933TR-ND/4966463, MF="TE Connectivity Passive Product", MP=CPF0402B200KE, SnapEDA_Link=https://www.snapeda.com/parts/CPF0402B200KE/TE%20Connectivity/view-part/?ref=search&t=CPF0402B200KE
R21: "28 kOhms ±0.1% 0.063W, 1/16W Chip Resistor 0402 (1005 Metric) Automotive AEC-Q200 Thin Film", Package=None, Digi-Key_Part_Number=P28KDCTR-ND, Digi-Key_Purchase_URL=https://www.digikey.com.au/product-detail/en/panasonic-electronic-components/ERA-2AEB2802X/P28KDCTR-ND/2026182, MF="Panasonic Electronic Components", MP=ERA-2AEB2802X, SnapEDA_Link=https://www.snapeda.com/parts/ERA-2AEB2802X/Panasonic/view-part/?ref=search&t=ERA-2AEB2802X
T1: "127µH Isolation and Data Interface (Encapsulated) Pulse Transformer 1:0.292:0.208 Surface Mount", Package=None, Digi-Key_Part_Number=553-1984-1-ND, Digi-Key_Purchase_URL=https://www.digikey.com.au/product-detail/en/pulse-electronics-power/PA1138NLT/553-1984-1-ND/3179343, MF="Pulse Electronics Power", MP=PA1138NLT, SnapEDA_Link=https://www.snapeda.com/parts/PA1138NLT/Pulse%20Electronics/view-part/?ref=search&t=PA1138NLT
U1: "Power Switch ICs - POE / LAN LTC4267 - Power over Ethernet IEEE 802.3af PD Interface with Integrated Switching Regulator", Package=None, Availability=Unavailable, MF="Analog Devices / Linear Technology", MP=LTC4267CDHC, Price=None, SnapEDA_Link=https://www.snapeda.com/parts/LTC4267CDHC/Analog%20Devices/view-part/4219202/?ref=snap
U2: "Shunt Voltage Reference IC 36V ±0.4% 8-SOIC", Digi-Key Part Number=LT1431CS8#PBF-ND, MF="Linear Technology/Analog Devices", MP=LT1431CS8#PBF, SnapEDA_Link=https://www.snapeda.com/parts/LT1431CS8%23PBF/Analog%20Devices/view-part/4342248/?ref=snap
D4: SnapEDA_Link=https://www.snapeda.com/parts/PDS360-13/Diodes%20Inc./view-part/110877/?ref=snap
J2: SnapEDA_Link=https://www.snapeda.com/parts/1-2301994-2/TE%20Connectivity%20AMP%20Connectors/view-part/1504817/?ref=snap

## Via types
v1: diameter 0.8, hole 0.4, Top Layer to Bottom Layer, 506 vias
v2: diameter 0.6, hole 0.4, Top Layer to Bottom Layer, 13 vias
v3: diameter 1, hole 0.6, Top Layer to Bottom Layer, 11 vias
v4: diameter 3, hole 3, Top Layer to Bottom Layer, 4 vias

## Nets (pads, with @x,y where several pads share a name; then routed paths per layer and width w, separated by ;. In a path a pad name is that pad's centre, name@x,y a point inside that pad or via, vN(x,y) a via of type N, cw(c..) or ccw(c..) an arc to the next point about the centre after c; other vN are vias at no path point)
GND: C1.2 C2.2 C9.1 C12.2 C13.1 C14.1 D6.A E5.1 ISO1.3 J2.SH1 J2.SH2 R14.2 T1.1 U1.2 U1.10 U1.15 U1.16 U1.17
  other v1: 46.5,52.5 49.5,52.5 51,52.5 52.5,52.5 54,52.5 55.5,52.5 57,52.5 58.5,52.5 60,52.5 61.5,52.5 63,52.5 64.5,52.5 66,52.5 67.5,52.5 69,52.5 70.5,52.5 72,52.5 73.5,52.5 75,52.5 76.5,52.5 78,52.5 79.5,52.5 81,52.5 82.5,52.5 84,52.5 85.5,52.5 87,52.5 88.5,52.5 50.25,54 51.75,54 53.25,54 54.75,54 56.25,54 57.75,54 59.25,54 60.75,54 62.25,54 63.75,54 65.25,54 66.75,54 68.25,54 69.75,54 71.25,54 72.75,54 74.25,54 75.75,54 77.25,54 78.75,54 80.25,54 81.75,54 83.25,54 84.75,54 86.25,54 87.75,54 89.25,54 51,55.5 52.5,55.5 54,55.5 55.5,55.5 57,55.5 58.5,55.5 60,55.5 61.5,55.5 63,55.5 64.5,55.5 66,55.5 67.5,55.5 69,55.5 70.5,55.5 72,55.5 73.5,55.5 75,55.5 76.5,55.5 78,55.5 79.5,55.5 81,55.5 88.5,55.5 47.25,57 48.75,57 50.25,57 51.75,57 53.25,57 54.75,57 56.25,57 57.75,57 59.25,57 60.75,57 62.25,57 63.75,57 65.25,57 66.75,57 68.25,57 69.75,57 78.75,57 80.25,57 81.75,57 89.25,57 46.5,58.5 48,58.5 49.5,58.5 51,58.5 52.5,58.5 54,58.5 55.5,58.5 57,58.5 58.5,58.5 60,58.5 61.5,58.5 63,58.5 64.5,58.5 66,58.5 67.5,58.5 70.5,58.5 72,58.5 73.5,58.5 47.25,60 48.75,60 50.25,60 51.75,60 53.25,60 54.75,60 56.25,60 57.75,60 59.25,60 60.75,60 62.25,60 63.75,60 65.25,60 66.75,60 69.75,60 71.25,60 87.75,60 89.25,60 46.5,61.5 48,61.5 49.5,61.5 51,61.5 52.5,61.5 54,61.5 55.5,61.5 57,61.5 58.5,61.5 60,61.5 61.5,61.5 63,61.5 64.5,61.5 66,61.5 69,61.5 70.5,61.5 88.5,61.5 47.25,63 48.75,63 50.25,63 51.75,63 53.25,63 54.75,63 56.25,63 57.75,63 59.25,63 60.75,63 62.25,63 63.75,63 65.25,63 78.75,63 89.25,63 46.5,64.5 48,64.5 49.5,64.5 51,64.5 52.5,64.5 54,64.5 58.5,64.5 60,64.5 61.5,64.5 63,64.5 64.5,64.5 66,64.5 70.5,64.5 72,64.5 85.5,64.5 87,64.5 47.25,66 50.25,66 51.75,66 53.25,66 59.25,66 60.75,66 62.25,66 63.75,66 65.25,66 77.25,66 78.75,66 83.25,66 84.75,66 86.25,66 87.75,66 89.25,66 46.5,67.5 57,67.5 73.5,67.5 85.5,67.5 87,67.5 88.5,67.5 47.25,69 50.25,69 56.25,69 57.75,69 84.75,69 86.25,69 87.75,69 89.25,69 46.5,70.5 51,70.5 52.5,70.5 54,70.5 55.5,70.5 57,70.5 47.25,72 48.75,72 50.25,72 51.75,72 53.25,72 54.75,72 56.25,72 57.75,72 63.75,72 86.25,72 87.75,72 89.25,72 46.5,73.5 48,73.5 49.5,73.5 51,73.5 52.5,73.5 54,73.5 55.5,73.5 57,73.5 63,73.5 85.5,73.5 87,73.5 88.5,73.5 47.25,75 48.75,75 50.25,75 51.75,75 53.25,75 54.75,75 56.25,75 84.75,75 86.25,75 87.75,75 89.25,75 46.5,76.5 48,76.5 49.5,76.5 51,76.5 52.5,76.5 54,76.5 55.5,76.5 57,76.5 63,76.5 47.25,78 50.25,78 54.75,78 56.25,78 86.25,78 87.75,78 89.25,78 46.5,79.5 55.5,79.5 57,79.5 60,79.5 63,79.5 47.25,81 50.25,81 59.25,81 60.75,81 46.5,82.5 48,82.5 51,82.5 52.5,82.5 54,82.5 60,82.5 61.5,82.5 63,82.5 64.5,82.5 66,82.5 47.25,84 50.25,84 51.75,84 53.25,84 54.75,84 56.25,84 59.25,84 60.75,84 62.25,84 63.75,84 65.25,84 66.75,84 68.25,84 83.25,84 87.75,84 46.5,85.5 48,85.5 84,85.5 88.5,85.5 47.25,87 48.75,87 50.25,87 51.75,87 53.25,87 54.75,87 56.25,87 59.25,87 60.75,87 62.25,87 63.75,87 65.25,87 46.5,88.5 48,88.5 49.5,88.5 51,88.5 52.5,88.5 54,88.5 55.5,88.5 57,88.5 47.25,90 48.75,90 50.25,90 51.75,90 53.25,90 54.75,90 56.25,90 57.75,90 59.25,90 60.75,90 62.25,90 63.75,90 65.25,90 66.75,90 68.25,90 51,91.5 52.5,91.5 54,91.5 55.5,91.5 57,91.5 58.5,91.5 60,91.5 61.5,91.5 63,91.5 64.5,91.5 66,91.5 67.5,91.5 50.25,93 51.75,93 53.25,93 54.75,93 56.25,93 57.75,93 59.25,93 60.75,93 62.25,93 63.75,93
GROUND: C6.1 C7.2 C8.2 C15.2 D8.K E8.1 ISO2.2 J1.2 R21.1 T1.9 T1.10 U2.5 U2.6
  other v1: 91.5,52.5 93,52.5 94.5,52.5 96,52.5 97.5,52.5 99,52.5 100.5,52.5 102,52.5 103.5,52.5 105,52.5 106.5,52.5 108,52.5 109.5,52.5 111,52.5 112.5,52.5 115.5,52.5 92.25,54 93.75,54 95.25,54 96.75,54 98.25,54 99.75,54 101.25,54 102.75,54 104.25,54 105.75,54 107.25,54 108.75,54 110.25,54 111.75,54 91.5,55.5 93,55.5 94.5,55.5 96,55.5 97.5,55.5 111,55.5 115.5,55.5 95.25,57 113.25,57 114.75,57 114,58.5 115.5,58.5 92.25,60 93.75,60 96.75,60 98.25,60 99.75,60 104.25,60 105.75,60 114.75,60 91.5,61.5 93,61.5 99,61.5 100.5,61.5 115.5,61.5 99.75,63 114.75,63 91.5,64.5 99,64.5 100.5,64.5 92.25,66 93.75,66 95.25,66 96.75,66 91.5,67.5 93,67.5 94.5,67.5 96,67.5 100.5,67.5 92.25,69 93.75,69 95.25,69 110.25,69 111.75,69 111,70.5 112.5,70.5 115.5,70.5 92.25,72 93.75,72 95.25,72 111.75,72 91.5,73.5 93,73.5 94.5,73.5 92.25,75 93.75,75 95.25,75 93.75,78 95.25,78 111.75,78 97.5,82.5 99,82.5 115.5,82.5 98.25,84 101.25,84 97.5,85.5 99,85.5 102,85.5 106.5,85.5 115.5,85.5 98.25,87 101.25,87 102.75,87 104.25,87 105.75,87 107.25,87 108.75,87 110.25,87 111.75,87 114.75,87 97.5,88.5 99,88.5 106.5,88.5 111,88.5 115.5,88.5 98.25,90 99.75,90 101.25,90 102.75,90 110.25,90 111.75,90 113.25,90 114.75,90 97.5,91.5 99,91.5 100.5,91.5 102,91.5 103.5,91.5 105,91.5 106.5,91.5 108,91.5 109.5,91.5 111,91.5 98.25,93 99.75,93 101.25,93 102.75,93 104.25,93 105.75,93 107.25,93 108.75,93 110.25,93 111.75,93
NetC1_1: C1.1 C4.1 D3.A D7.2 D11.2 E3.1 L1.1
NetC2_1: C2.1 D2.C L1.2 Q1.1 R3.1 R4.1 R5.2 T1.4 | length 21.4
  Top Layer w0.254: D2.C 68.086,68.937 68.424,69.275 R3.1 ; R4.1 R3.1 ; Q1.1 70.886,69.273 69.061,69.273 R3.1
  Top Layer w0.5: R4.1 69.059,71.079 68.35,71.788 68.35,72.955 69.299,73.904 75.608,73.904 C2.1
NetC3_1: C3.1 R2.1 | length 1.2
  Top Layer w0.254: R2.1 C3.1
NetC3_2: C3.2 C6.2 C7.1 C8.1 C17.2 D1.2 D4.3 E2.1 R7.1 R13.2 R18.2 | length 30
  Top Layer w0.254: R13.2 105.688,58.68 106.523,59.515 106.523,63.329 106.133,63.719 105.888,63.719 C17.2 105.745,65.538 105.735,65.529 104.484,65.529 R18.2
  Top Layer w0.5: R7.1 101.124,88.124 100.4,87.4 100.4,82.16 100.813,81.747 101.73,81.747 C6.2 101.75,80.25 102.2,79.8 104.334,79.8 C7.1
NetC4_2: C4.2 D3.K D7.1 D11.1 E4.1 R15.1 R19.1 U1.7 | length 45.6
  Top Layer w0.254: D7.1 73.3,78.7 67.2,72.6 67.2,60.627 70.522,57.305 77.605,57.305 78.197,57.897 ; U1.7 79.72,59.527 78.96,59.527 78.755,59.322 78.35,59.322 R15.1 78.197,57.897 ; R19.1 85.588,58.64 85.435,58.487 85.395,58.487 85.308,58.4 84.3,58.4 83.945,58.045 78.345,58.045 78.197,57.897
NetC5_1: C5.1 R5.1 | length 1.2
  Top Layer w0.5: R5.1 C5.1
NetC5_2: C5.2 Q2.1 Q2.2 Q2.5 Q2.6 T1.3 | length 0.6
  Top Layer w0.5: T1.3@81.931,73.412 T1.3
NetC9_2: C9.2 R8.2 R9.1 | length 2.7
  Top Layer w0.254: R8.2 71.351,62.738 72.712,62.738 R9.1 ; C9.2@72.719,61.399 R9.1@72.719,62.731
NetC11_1: C11.1 ISO1.1 R10.1 | length 2.6
  Top Layer w0.254: ISO1.1 C11.1 R10.1
NetC11_2: C11.2 C15.1 R10.2 R13.1 U2.3 | length 9
  Top Layer w0.254: C11.2 94.964,62.109 ; U2.3 94.964,62.109 ; R13.1 C15.1 94.964,62.109
NetC12_1: C12.1 D10.A D12.A U1.1 | length 16.8
  Top Layer w0.254: D10.A C12.1 74.901,65.36 74.901,65.03 75.282,64.649 76.171,64.649 76.552,64.268 v2(77.568,64.268) 78.757,64.268 79.743,63.282 U1.1 ; D12.A v2(84.258,64.6)
  Bottom Layer w0.254: v2(77.568,64.268) 83.156,64.268 83.488,64.6 v2(84.258,64.6)
NetC13_2: C13.2 D2.A D10.C R8.1 | length 7.2
  Top Layer w0.254: D2.A R8.1 D10.C 71.345,66.173 71.599,66.427 C13.2
NetC14_2: C14.2 U1.4 | length 6.2
  Top Layer w0.254: v2(74.8,60.004) 74.806,59.998 C14.2 ; v2(77.8,61) 77.85,61.05 U1.4
  Bottom Layer w0.254: v2(74.8,60.004) 76.804,60.004 v2(77.8,61)
NetC16_1: C16.1 ISO1.2 U2.1 | length 7.4
  Top Layer w0.254: ISO1.2 93.959,63.887 94.721,64.649 U2.1 97.329,65.614 97.821,66.106 98.405,66.106 C16.1
NetC16_2: C16.2 R17.2 | length 2.1
  Top Layer w0.254: C16.2 R17.2
NetC17_1: C17.1 R17.1 R18.1 R21.2 U2.8 | length 6.7
  Top Layer w0.254: R17.1 102.26,64.652 U2.8 R18.1 104.483,64.641 104.483,63.007 R21.2 C17.1
NetD4_1: D4.1 D4.2 R2.2 T1.7 T1.8 | length 0
  Top Layer w0.254: D4.1 D4.1@102.025,75.61
NetD5_A: D5.A R6.1 | length 2.5
  Top Layer w0.254: R6.1 73.164,72.523 73.588,72.099 D5.A
NetD5_C: D5.C Q1.3 R4.2 R12.1 R20.1 | length 31
  Top Layer w0.254: R4.2 D5.C 71.94,71.039 73.072,69.907 ; Q1.3 73.072,69.907 ; v3(74.774,69.856) 74.723,69.907 73.072,69.907 ; v2(74.825,61.05) 75.663,61.05 ; 75.657,61.044 75.663,61.05 ; R20.1@76.823,60.001 R20.1 76.806,60.024 76.806,61.05 75.663,61.05 ; v2(84.299,61.093) R12.1
  Bottom Layer w0.254: v3(74.774,69.856) 74.774,65.157 73.758,64.141 73.758,62.117 v2(74.825,61.05) 76.05,61.05 76.7,61.7 78.4,61.7 79.007,61.093 v2(84.299,61.093) v2@84.256,61.05
NetD6_C: D6.C Q1.2 R3.2 | length 2.8
  Top Layer w0.254: R3.2 D6.C Q1.2
NetD7_3: D7.3 J2.P5 | length 12
  Top Layer w0.5: v3(66,75.4) 66,80.4 66.8,81.2 D7.3
  Bottom Layer w0.5: J2.P5 64.87,74.47 65.8,75.4 v3(66,75.4)
NetD7_4: D7.4 J2.P10 | length 18.2
  Top Layer w0.5: v3(66.05,68.12) 66.05,73.1 68,75.05 D7.4
  Bottom Layer w0.5: J2.P10 v3(66.05,68.12)
NetD8_A: D8.A R7.2 | length 2.2
  Top Layer w0.5: R7.2 104.915,88.994 D8.A
NetD9_A: D9.A Q2.3 U1.3 | length 12.7
  Top Layer w0.254: v2(74.901,63.506) 76.552,63.506 77.06,62.998 77.816,62.998 78.197,62.617 78.197,62.087 D9.A 78.66,61.55 U1.3 ; v2(75.657,68.027) Q2.3
  Bottom Layer w0.254: v2(74.901,63.506) 75.028,63.506 75.657,64.135 v2(75.657,68.027)
NetD9_C: D9.C R9.2 | length 2.7
  Top Layer w0.254: R9.2 73.6,62.744 74.012,62.744 74.706,62.05 D9.C
NetD11_3: D11.3 J2.P6 | length 25.7
  Top Layer w0.5: v3(58.2,88.4) 67.9,88.4 D11.3 ; J2.P6 59.251,73.2 J2.P6@59.327,73.276
  Bottom Layer w0.5: v3(58.2,88.4) 58.146,88.346 58.146,74.254 J2.P6
NetD11_4: D11.4 J2.P11 | length 24
  Top Layer w0.5: J2.P11@48.913,80.603 J2.P11 48.79,84.59 50,85.8 D11.4
NetD12_C: D12.C ISO1.4 R12.2 | length 3.3
  Top Layer w0.254: R12.2 D12.C ISO1.4
NetD13_A: D13.A ISO2.1 | length 1.6
  Top Layer w0.254: ISO2.1 D13.A
NetD13_C: D13.C R16.1 | length 1.4
  Top Layer w0.254: D13.C R16.1
NetE6_1: E6.1 R20.2 U1.11 | length 13.7
  Top Layer w0.254: v3(76.826,58.045) R20.2 ; U1.11 82.671,60.027 83.206,60.027 83.41,59.823 83.41,59.304 83.65,59.064 v2(83.65,58.945)
  Bottom Layer w0.254: v3(76.826,58.045) 83.523,58.045 83.65,57.918 ; E6.1 83.65,56.253 83.65,57.918 ; v2(83.65,58.945) 83.65,57.918
NetE7_1: E7.1 ISO2.3 R19.2 U1.12 | length 11.5
  Top Layer w0.254: U1.12 82.671,60.527 83.341,60.527 v2(84.045,59.823) ; v2(86.458,59.823) R19.2 ISO2.3
  Bottom Layer w0.254: v2(84.045,59.823) v2(86.458,59.823) E7.1
NetISO2_4: ISO2.4 U1.13 | length 8.7
  Top Layer w0.254: U1.13 82.671,61.027 83.586,61.027 84.572,60.041 84.572,59.069 v2(84.553,59.05) ; v2(84.553,57.41) ISO2.4
  Bottom Layer w0.254: v2(84.553,57.41) v2(84.553,59.05)
NetQ2_4: Q2.4 R11.2 R14.1 | length 3.4
  Top Layer w0.254: Q2.4 R11.2 R14.1
NetR6_2: R6.2 T1.2 | length 15
  Top Layer w0.254: v3(69.821,72.523) R6.2 ; v3(80.215,71.146) 80.449,70.912 T1.2
  Bottom Layer w0.254: v3(69.821,72.523) 78.838,72.523 v3(80.215,71.146)
NetR11_1: R11.1 U1.14 | length 7.6
  Top Layer w0.254: R11.1 79.727,64.395 80.26,63.862 83.181,63.862 83.537,63.506 83.537,61.855 83.255,61.573 82.671,61.573 U1.14
NetR15_2: R15.2 U1.5 | length 1.9
  Top Layer w0.254: R15.2 78.197,60.325 78.422,60.55 U1.5
POWER: D1.1 E1.1 J1.1 R16.2
RD+: J1.5 J2.P2 | length 55.1
  Bottom Layer w0.5: J2.P2 59.32,78.4 63.6,78.4 65.2,76.8 J1.5
RD-: J1.6 J2.P9 | length 61.9
  Top Layer w0.5: v3(64.8,69.4) v3(64.8,79.4)
  Bottom Layer w0.5: J2.P9 61.745,69.395 64.795,69.395 v3(64.8,69.4) ; v3(64.8,79.4) 64.86,79.34 J1.6
TD+: J1.3 J2.P1 | length 64
  Bottom Layer w0.5: J2.P1 63.39,81.2 114.2,81.2 115.4,80 115.4,73.52 J1.3 J1.3@113.48,71.6
TD-: J1.4 J2.P8 | length 58.7
  Top Layer w0.5: v3(109.6,70.2) v3(109.6,74.26)
  Bottom Layer w0.5: J2.P8 59.246,70.706 75.126,70.706 75.536,70.296 109.504,70.296 v3(109.6,70.2) ; v3(109.6,74.26) J1.4
pads on no net: J2.None J2.P3 J2.P4 J2.P7 J2.P12 J2.P13 J2.P14 T1.5 T1.6 U1.6 U1.8 U1.9 U2.2 U2.4 U2.7
copper on no net:
  other v4: 48,54.2 113.8,54.2 48,92 113.8,92

## Polygon pours and split planes (outlines as drawn)
GND on Top Layer "Top Layer-GND" (solid, pour order 88): 81.4,83.6 81.5,83.6 82.6,84.7 82.5,84.8 82.5,87.4 90.2,87.4 90.1,87.3 90.1,85.1 88.4,83.4 81.4,83.4
GND on Top Layer "Top Layer-GND 1" (solid, pour order 86): 45,95 45.2,94.8 68.4,94.8 68.4,90.7 70.522,88.578 70.522,74.9 74.612,74.9 75.745,73.767 75.745,68.825 76.035,68.825 77.06,67.8 77.16,67.9 80.5,67.9 80.5,71.1 81.527,72.127 84.104,72.127 84.9,72.923 84.6,73.223 84.6,74.4 83.3,75.7 83.3,76.8 83.6,76.8 88.5,81.7 94.048,81.7 94.048,80.407 90.5,76.859 90.5,51.431 44.931,51.431 44.8,51.3 44.8,94.5
GROUND on Top Layer "Top Layer-GROUND" (solid, pour order 84): 96.3,94.8 116.5,94.8 116.5,51.5 116.8,51.2 90.5,51.2 90.5,76.7 96.8,83
NetC3_2 on Top Layer "Top Layer-NetC3_2" (solid, pour order 78): 111.5,85.7 114.1,85.7 114.8,85 114.8,82.2 113.95,81.35 111.95,81.35 111.2,80.6 111.2,78.159 109,75.959 109,73 108,72 105.2,72 104.8,71.6 104.8,67.392 105.2,66.992 105.2,65.8 104.7,65.3 103.142,65.3 103.142,66.308 101,68.45 101,71.5 101.8,71.5 103.142,72.842 103.142,76.442 104.2,77.5 104.2,81.285 105.115,82.2 109.8,82.2 110.6,83 110.5,83.1 110.5,84.8
POWER on Top Layer "Top Layer-POWER" (solid, pour order 82): 105.2,72 104.8,71.6 104.8,67.392 107,65.192 107,59.5 105.7,58.2 98.7,58.2 98.1,57.6 98.1,56.5 99.9,54.7 109.1,54.7 114.1,59.7 114.1,63.7 115.5,65.1 115.5,67.2 114.5,68.2 110.2,68.2 108.8,69.6 108.8,71.4 108.6,71.4 108,72
NetD4_1 on Top Layer "Top Layer-NetD4_1" (solid, pour order 80): 101.75,71.4 101.1,71.4 100.21,72.29 97,72.29 97,72.4 96.3,73.1 96.35,73.15 96.35,76.85 96.7,77.2 99.6,77.2 101,78.6 102.842,78.6 103.142,78.3 103.142,72.842
NetC5_2 on Top Layer "Top Layer-NetC5_2" (solid, pour order 76): 82.4,75.3 83.7,75.3 84.8,74.2 84.8,72.4 84.77,72.4 84.27,71.9 81.3,71.9 81,71.6 81,68.5 76.35,68.5 75.7,69.15 75.7,71.788 79.688,71.788 80.15,72.25 80.15,73
NetC4_2 on Top Layer "Top Layer-NetC4_2" (solid, pour order 74): 73.3,94.8 73.1,94.6 69,94.6 69,90.1 70,89.1 70,75.786 71.286,74.5 75.038,74.5 79.251,78.713 79.251,81.682 79.546,81.682 82.521,84.657 82.521,86.9 82.491,86.9 82,87.391 81.709,87.1 78.5,87.1 78.5,87.027 77.9,86.427 77.9,80.7 77,79.8 74,79.8 73.164,80.636 73.164,81.864 73.9,82.6 76.109,82.6 76.6,83.091 76.6,86.9 76.2,87.3 74.012,87.3 73.164,88.148 73.164,94.9
NetC2_1 on Top Layer "Top Layer-NetC2_1" (solid, pour order 72): 90.4,87.4 95.521,87.4 96.321,86.6 96.321,83.321 94.4,81.4 88.5,81.4 88.5,81.35 86.2,79.05 80.15,73 78.9,73 77.1,73 77.1,72 75.4,72 75.4,74.6 79.3,78.5 79.3,81.436 81.164,83.3 88.5,83.3 88.5,83.4 90.1,85
NetC1_1 on Top Layer "Top Layer-NetC1_1" (solid, pour order 70): 73.5,94.8 73.5,87.812 74.012,87.3 76.2,87.3 76.6,86.9 76.6,83.091 76.1,82.591 76.091,82.6 73.9,82.6 73.9,82.536 73.164,81.8 73.4,81.564 73.4,80.4 74,79.8 76.716,79.8 77.816,80.9 77.8,80.916 77.8,86.7 78.6,87.5 95.6,87.5 96.4,88.3 96.3,88.4 96.3,94.8
no net on Top Layer "Top Layer-No Net 7" (solid, pour order 68): 72.9,94.8
no net on Top Layer "Top Layer-No Net" (solid, pour order 48): 103,95
no net on Top Layer "Top Layer-No Net 1" (solid, pour order 42): 72.682,83.582
no net on Top Layer "Top Layer-No Net 2" (solid, pour order 22): 91.059,84.582
no net on Top Layer "Top Layer-No Net 3" (solid, pour order 20): 89.281,91.059
no net on Top Layer "Top Layer-No Net 4" (solid, pour order 14): 122.301,93.091
no net on Top Layer "Top Layer-No Net 5" (solid, pour order 4): 118.11,93.091
no net on Top Layer "Top Layer-No Net 6" (solid, pour order 0): 110.998,93.853
GROUND on Bottom Layer "Bottom Layer-GROUND" (solid, pour order 92): 90.8,95.2 91,95 116.8,95 116.8,51.4 116.5,51.7 90.6,51.7
GND on Bottom Layer "Bottom Layer-GND" (solid, pour order 90): 45.299,94.8 91.3,94.8 90.8,94.3 90.8,51.9 45.3,51.9 45,51.6
no net on Bottom Layer "Bottom Layer-No Net" (solid, pour order 52): 104,95

## Keep-outs
Keep-Out Layer:
  lines w0.254: 45,51.2 45,95 116.8,95 116.8,51.2 45,51.2

## Silkscreen, mask and mechanical layers (free items; w line width, h text height)
Mechanical 1:
  lines w0.254: 42.692,52.724 43.2,51.2 ; 42.692,93.476 43.2,95 ; 42.946,51.2 43.454,51.2 ; 42.946,95 43.454,95 ; 43.2,66.6 43.2,51.2 ; 43.2,79.6 43.2,95 ; 43.708,52.724 43.2,51.2 ; 43.708,93.476 43.2,95 ; 44.9,50.054 44.9,49.546 ; 46.423,50.31 44.9,49.8 ; 46.425,49.294 44.9,49.8 ; 74.427,49.841 44.9,49.8 ; 87.173,49.859 116.7,49.9 ; 115.175,50.406 116.7,49.9 ; 115.177,49.39 116.7,49.9 ; 116.7,50.154 116.7,49.646
  text "43.8 (mm)" at 44.114,66.854 h1.52 r90
  text "71.8 (mm)" at 74.682,48.927 h1.52 r0.08

## Text inside footprints (layer, text, board x,y; h text height)
C7: Top Overlay "+" at 102.518,78.53 h1.52 r90
C8: Top Overlay "+" at 106.718,78.53 h1.52 r90
D1: Top Overlay "+" at 102.55,69.259 h1.52 r180
D3: Top Overlay "+" at 80.855,89.88 h1.52 r270
D7: Top Overlay "-" at 74.365,83.018 h1.52 r180; Top Overlay "+" at 74.492,77.557 h1.52 r180
D8: Top Overlay "+" at 108.455,90.356 h1.52
D11: Top Overlay "-" at 74.365,90.118 h1.52 r180; Top Overlay "+" at 74.492,84.657 h1.52 r180